# Altium PCB ATK_BC28_01.PcbDoc
Units mil, origin at the board's own origin, x right, y up, seen from the top; angles counter-clockwise.
Board outline 832.03 x 1662.03 mil, 2 copper layers (Top Layer, Bottom Layer); 39 components, 33 nets, 143 pads, 53 vias.
Unrouted connection lines stored in the file: 80.
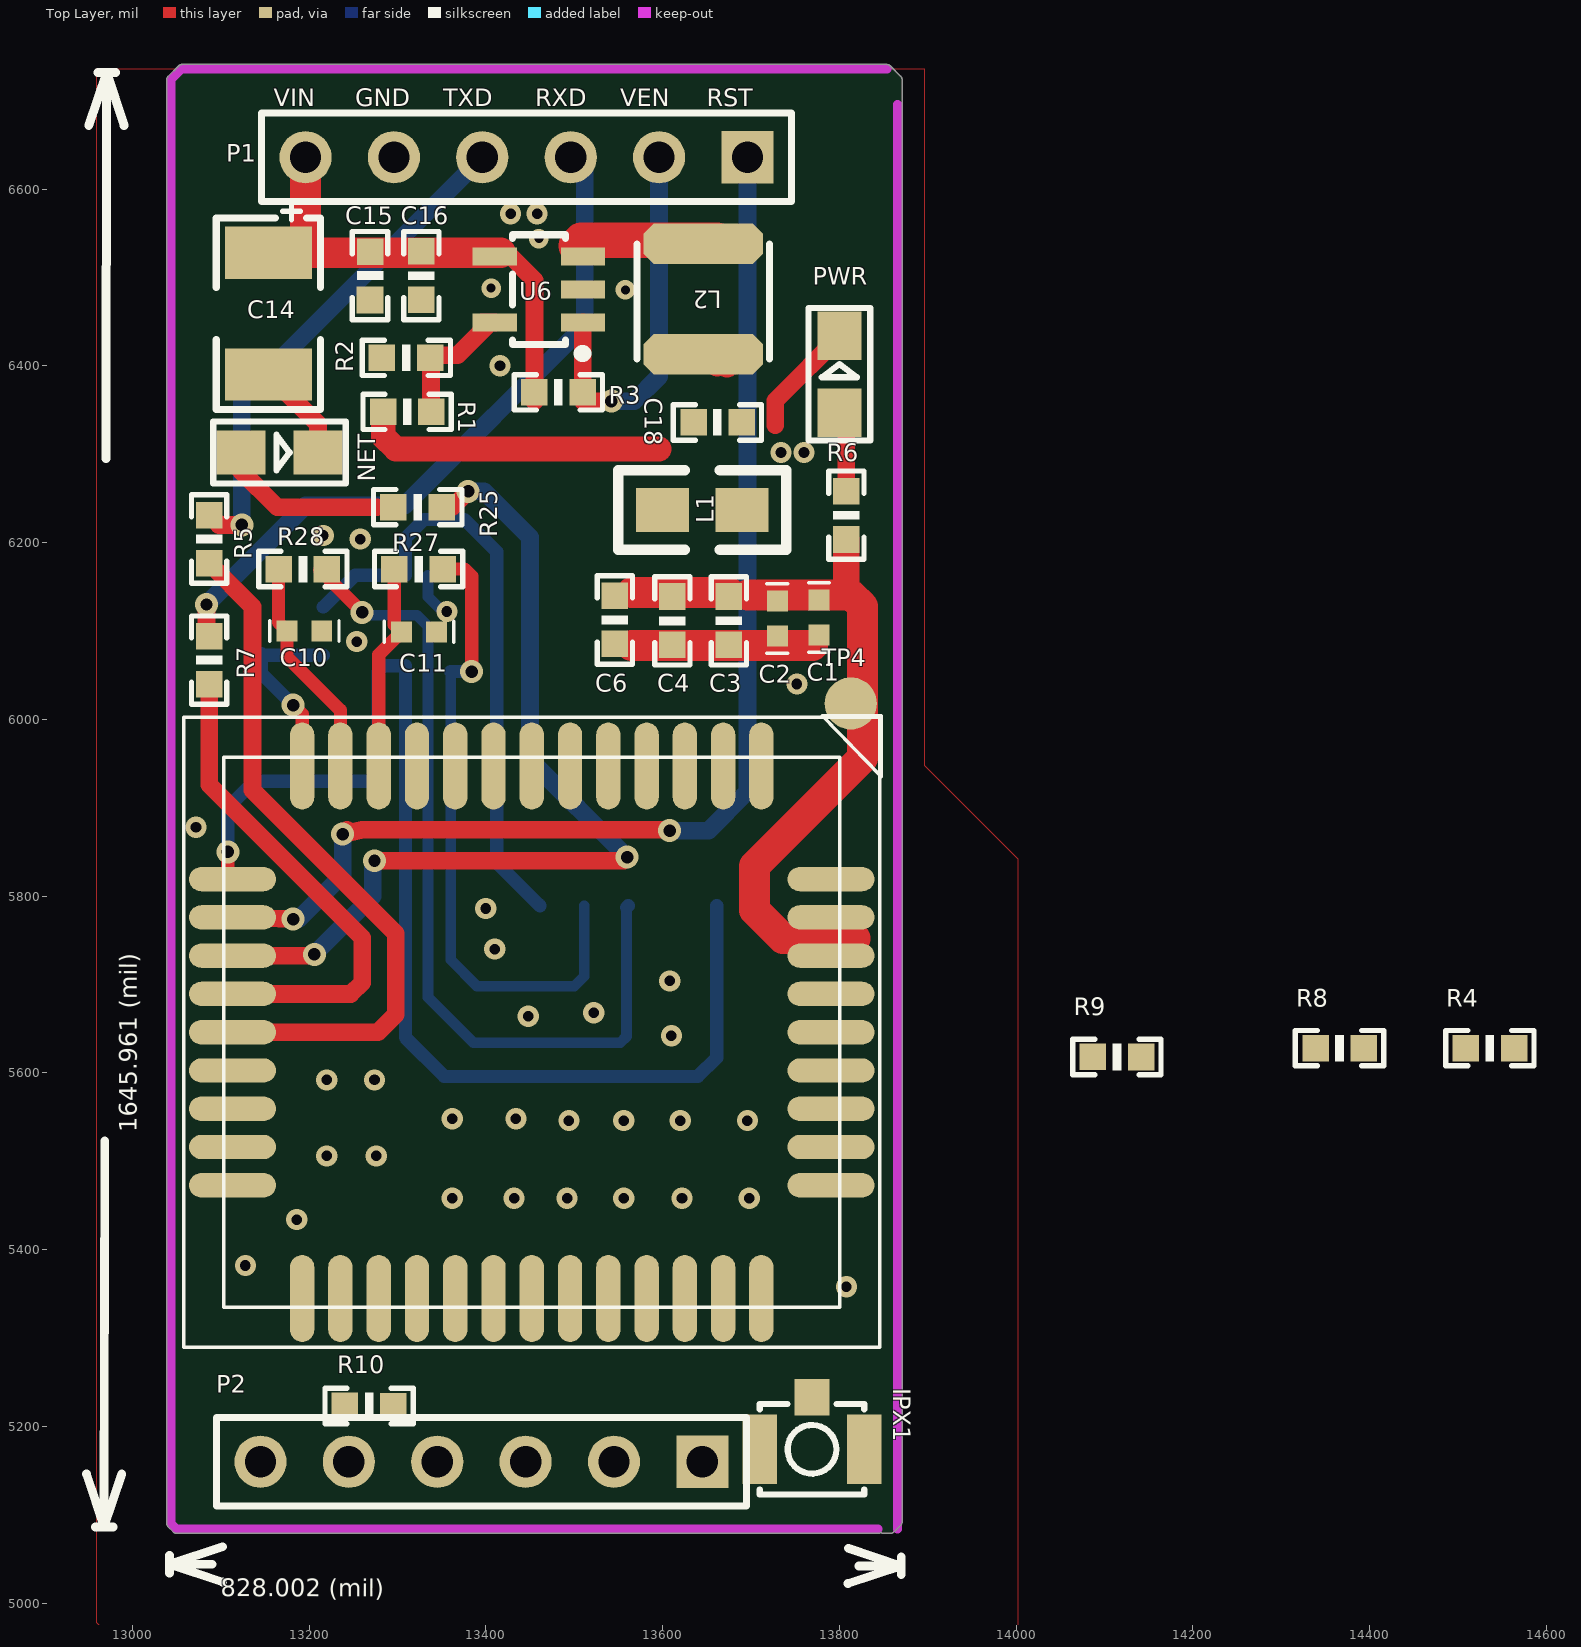
[diagram p0: Top Layer view]
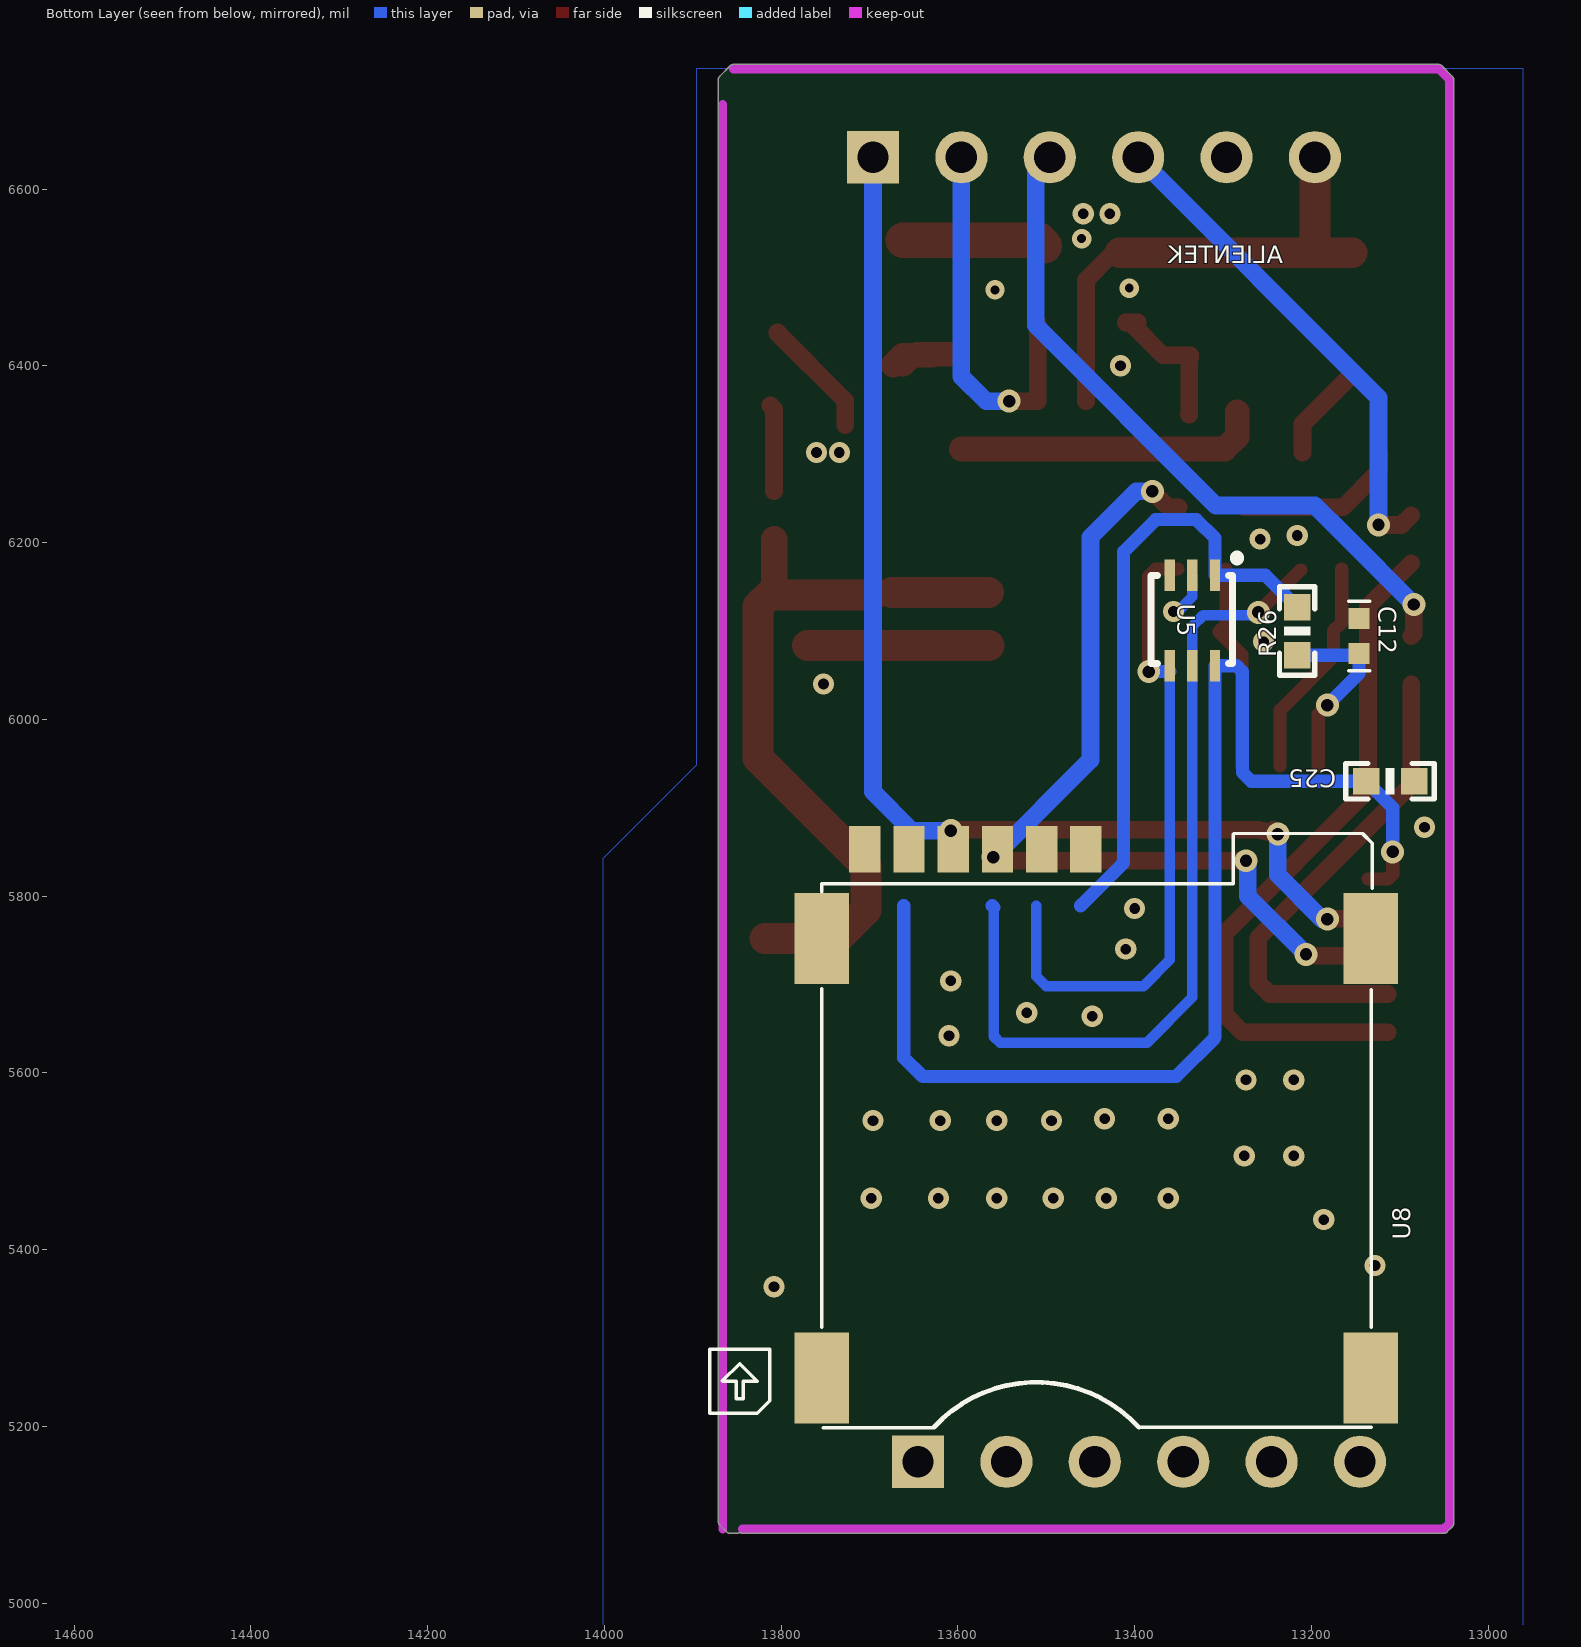
[diagram p1: Bottom Layer view, seen from below]

## Layer stack, top to bottom
Top Layer: signal copper 1.4
Dielectric: dielectric 12.6, FR-4, Dk 4.8
Bottom Layer: signal copper 1.4

## Board outline
13040.45,5086.45 13046.45,5080.45 13046.44,5080.47 ccw(c13050,5084) 13050,5078.98 13844,5078.98 ccw(c13844,5084) 13847,5079.98 ccw(c13850,5084) 13850,5078.98 13858,5078.98 ccw(c13858,5084) 13861.56,5080.47 13861.55,5080.45 13869.55,5088.45 13869.53,5088.44 ccw(c13866,5092) 13871.01,5092 13871.01,6724 ccw(c13866,6724) 13869.53,6727.56 13869.55,6727.55 13857.55,6739.55 13857.56,6739.53 ccw(c13854,6736) 13854,6741.02 13056,6741.02 ccw(c13056,6736) 13052.44,6739.53 13052.45,6739.55 13040.45,6727.55 13040.47,6727.56 ccw(c13044,6724) 13038.99,6724 13038.99,5090 ccw(c13044,5090)

## Design rules (kind name [scope] priority, off if disabled: settings)
Clearance [All] p1: gap=8
Clearance Clearance_Polygon [All] p2: gap=15
Clearance Clearance_Track [All] p3: gap=15
ComponentClearance [All] p1: gap=0 collisioncheckmode=3 verticalgap=0 showdistances=FALSE
FabricationTestPointUsage TestPointUsage [All] p1: valid=0 allowmultiple=FALSE
FabricationTestpoint Testpoint [(IsPad And (OnTopLayer Or OnBottomLayer))] p1: side=3 testpointundercomponent=TRUE minsize=40 maxsize=100 preferedsize=60 minholesize=0 maxholesize=40 preferedholesize=32 testpointgrid=1 allowsidetop=TRUE allowsidebottom=TRUE usegrid=TRUE gridtolerance=0.01
Height [All] p1: minheight=0 maxheight=2000 prefheight=500
HoleSize [All] p1: absolutevalues=TRUE maxlimit=100 minlimit=6 maxpercent=80.000 minpercent=20.000
HoleToHoleClearance [All] p1: gap=8 allowstackedmicrovias=TRUE
MinimumSolderMaskSliver [All] p1: minsoldermaskwidth=0
PlaneConnect [All] p1: planeconnectstyle=Direct reliefexpansion=20 reliefentries=4 reliefconductorwidth=10 reliefairgap=10
PolygonConnect [All] p1: connectstyle=Direct reliefconductorwidth=10 reliefentries=4 polygonreliefangle="90 Angle"
RoomDefinition ATK_BC28_01 [InComponentClass('ATK_BC28_01')] p1: confinementstyle=ConfineOut formatcopy=TRUE lockcomponents=FALSE outline 14538,4464 15002,4464 15002,4716 14538,4716
RoutingVias [All] p1: holewidth=22 width=22 viastyle="Through Hole" minholewidth=10 minwidth=22 maxholewidth=50 maxwidth=100
SilkToSilkClearance [All] p1: silktosilkclearance=0
SilkscreenOverComponentPads [All] p1: minsilkscreentomaskgap=0
SolderMaskExpansion [All] p1: expansion=6
Width PWR_IN [InNet('PWR_IN')] p1: maxlimit=40.94 minlimit=29.53 preferedwidth=39.37 minimp=50.000000 maximp=50.000000 favimp=50.000000
Width GND [InNet('GND')] p2: maxlimit=40 minlimit=10 preferedwidth=25 minimp=50.000000 maximp=50.000000 favimp=50.000000
Width VCC_IN [InNet('VCC_IN')] p3: maxlimit=45 minlimit=20 preferedwidth=40 minimp=50.000000 maximp=50.000000 favimp=50.000000
Width VCC_BAT [InNet('VCC_BAT')] p4: maxlimit=45 minlimit=30 preferedwidth=40 minimp=50.000000 maximp=50.000000 favimp=50.000000
Width [All] p5: maxlimit=45 minlimit=10 preferedwidth=15 minimp=50.000000 maximp=50.000000 favimp=50.000000
18 further rules are at their usual default settings.

## Components (designator, comment, footprint, x,y, rotation, side; value= is the part's Value field where it differs from the comment)
C1 "22pF" 0402 13776.94,6095.5 r90 top
C2 "100pF" 0402 13729.94,6094.5 r90 top
C3 "104" 0603P 13674.94,6111.5 r90 top
C4 "1uF" 0603P 13610.94,6111.5 r90 top
C6 "10uF" 0603P 13545.94,6112.5 r90 top
C10 "22pF" 0402 13175,6100 r0 top
C11 "22pF" 0402 13344,6099 r180 top
C12 "22pF" 0402 13146,6114 r270 bottom
C14 "100uF" C3528 13154,6528 r270 top
C15 "10uF" 0603P 13269,6502 r270 top
C16 "0.1uF" 0603P 13327,6502 r90 top
C18 "10uF" 0603P 13662,6336 r0 top
C25 "104" 0603P 13111,5930 r180 bottom
IPX1 "IPEX" IPEX 13710,5174 r0 top
L1 "270R Beads" 0805 13600,6237 r0 top
L2 "4.7uH" L_4.7 13646,6403 r90 top
NET "LED" SMDLED 13123,6302 r0 top
P1 "Header 6" HDR1X6 13696,6636 r180 top
P2 "Header 6" HDR1X6 13645,5160 r180 top
PWR "LED" SMDLED 13800,6347 r90 top
R1 "50K" 0603P 13311,6348 r0 top
R2 "10K" 0603P 13310,6409 r180 top
R3 "100K" 0603P 13482,6370 r0 top
R4 "1K" 0603P 14536,5628 r0 top
R5 "1K" 0603P 13087,6204 r270 top
R6 "1K" 0603P 13808,6231 r270 top
R7 "1K" 0603P 13087,6067 r270 top
R8 "1K" 0603P 14366,5628 r0 top
R9 "1K" 0603P 14114,5618 r0 top
R10 "1K" 0603P 13268,5223 r180 top
R25 "1K" 0603P 13323,6240 r180 top
R26 "22R" 0603P 13216,6100 r270 bottom
R27 "22R" 0603P 13324,6170 r180 top
R28 "22R" 0603P 13193,6170 r180 top
TP4 "TEST POINT" TP-1.5 13813,6018 r90 top
U5 "SMF05C" SMF05C 13309,6163 r270 bottom
U6 "mp2128" SOT-23-5 13510,6449 r180 top
U8 "Micro SIM" "Micro SIM" 13754,5752 r180 bottom
? "MG2260" MG2260 13452,5646 r270 top

## Footprints (in the part's own frame and the unit in brackets; to place one, negate y for a bottom-side part, rotate by r counter-clockwise, add the part's x,y. Pads: shape width x height; smd on the part's side, far side on the other; paste and mask are expansions set on the pad)
0402 [mm]
  rect 0.6x0.6 smd: 1(0,0) 2(1,0)
  silkscreen extent -0.5,-0.3 1.5,0.3
0603P [mil]
  rect 30x30 smd: 1(-27,0) 2(27.5,-0.06)
  silkscreen extent -50,-20 50,20
0805 [mil]
  rect 60x50 smd: 1(0,-0.06) 2(90,-0.06)
  silkscreen extent -50,-45 140,45
C3528 [mm] "1210 3.5MM*2.8MM"
  rect 1.5x2.5 smd: 1(0,0) 2(3.5,0)
  silkscreen extent -1.45,-1.5 4.5,1.5
HDR1X6 [mm] "Connector; Header; 6 Position"
  rect 1.5x1.5 hole 0.9: 1(0,0)
  round 1.5 hole 0.9: 2(2.54,0) 3(5.08,0) 4(7.62,0) 5(10.16,0) 6(12.7,0)
  silkscreen extent -1.27,-1.27 13.97,1.27
IPEX [mm] "IPEX座 2.6mm*2.6mm*1.25mm"
  rect 1x2 smd: 1(0,0) 3(3,0)
  rect 1x1.05 smd: 2(1.5,1.5)
  silkscreen extent 0,-1.3 3,1.3
L_4.7 [mil] "4mm*4mm"
  oct 45.74x135.48 smd: 1(10,0) 2(135,0)
  silkscreen extent 5,-75 135,75
MG2260 [mm]
  oval 2.5x0.7 smd: 1(-7.65,6.6) 2(-7.65,5.5) 3(-7.65,4.4) 4(-7.65,3.3) 5(-7.65,2.2) 6(-7.65,1.1) 7(-7.65,0) 8(-7.65,-1.1) 9(-7.65,-2.2) 10(-7.65,-3.3) 11(-7.65,-4.4) 12(-7.65,-5.5) 13(-7.65,-6.6) 23(7.65,-6.6) 24(7.65,-5.5) 25(7.65,-4.4) 26(7.65,-3.3) 27(7.65,-2.2) 28(7.65,-1.1) 29(7.65,0) 30(7.65,1.1) 31(7.65,2.2) 32(7.65,3.3) 33(7.65,4.4) 34(7.65,5.5) 35(7.65,6.6)
  oval 0.7x2.5 smd: 14(-4.4,-8.6) 15(-3.3,-8.6) 16(-2.2,-8.6) 17(-1.1,-8.6) 18(0,-8.6) 19(1.1,-8.6) 20(2.2,-8.6) 21(3.3,-8.6) 22(4.4,-8.6) 36(4.4,8.6) 37(3.3,8.6) 38(2.2,8.6) 39(1.1,8.6) 40(0,8.6) 41(-1.1,8.6) 42(-2.2,8.6) 43(-3.3,8.6) 44(-4.4,8.6)
  silkscreen extent -9.1,-10 9.05,10.05
"Micro SIM" [mm] "6P 自弹式"
  rect 0.9x1.34 smd: 1(1.24,2.565) 2(2.51,2.565) 3(3.78,2.565) 4(5.05,2.565) 5(6.32,2.565) 6(7.59,2.565)
  rect 1.56x2.61 smd: ""(0,-12.63) ""(0,0) ""(15.78,-12.63) ""(15.78,0)
  silkscreen extent -3.23,-14.06 15.82,3.02
SMDLED [mm]
  rect 1.4x1.27 smd: 1(0.001,-0.002) 2(2.211,-0.002)
  silkscreen extent -0.8,-0.89 3.01,0.89
SMF05C [mm] "SOT-363"
  rect 0.9x0.3 smd: 1(0,0) 2(0,-0.65) 3(0,-1.3) 4(2.6,-1.3) 5(2.6,-0.65) 6(2.6,0)
  silkscreen extent -0.51,-1.84 2.54,0.64
SOT-23-5 [mil]
  rect 50x20 smd: 1(0,0) 2(0,-37.4) 3(0,-74.8) 4(100,-74.8) 5(100,0)
  silkscreen extent 0,-99 80,35
TP-1.5 [mm] "1.5mm"
  round 1.5 smd: 1(0,0)

## Part data
C1 C2 C3 C4 C6 C10 C11 C12 C15 C16 C18 C25: library part C
C14: library part CAP
IPX1: "IPEX座"
L1: library part L
L2: library part L_SOP
P1 P2: "Header, 6-Pin"
R1 R2 R3 R4 R5 R6 R7 R8 R9 R10 R25 R26 R27 R28: library part R
TP4: library part TEST-POINT, "测试点"
U5: "TVS"

## Via types
v1: diameter 24, hole 12, Top Layer to Bottom Layer, 36 vias
v2: diameter 26, hole 14, Top Layer to Bottom Layer, 14 vias
v3: diameter 22, hole 10, Top Layer to Bottom Layer, 3 vias

## Nets (pads, with @x,y where several pads share a name; then routed paths per layer and width w, separated by ;. In a path a pad name is that pad's centre, name@x,y a point inside that pad or via, vN(x,y) a via of type N, cw(c..) or ccw(c..) an arc to the next point about the centre after c; other vN are vias at no path point)
ADC: ?.9 P2.5
DRXD: P2.3 R8.1
DTXD: P2.4 R4.1
GND: ?.1 ?.10 ?.27 ?.34 ?.36 ?.37 ?.40 ?.41 C1.1 C2.1 C3.1 C4.1 C6.1 C10.2 C11.1 C12.1 C14.2 C15.2 C16.1 C18.2 C25.2 IPX1.1 IPX1.3 NET.2 P1.5 PWR.2 R2.2 U5.2 U6.2 U8.1 | length 506
  Top Layer w20: C14.2 13210.04,6334.16 NET.2 ; 13727.5,6332.94 13727.5,6360.62 13804.06,6437.18 PWR.2@13804.06,6438.04
  Top Layer w35: 13564.94,6083.5 13666.94,6083.5 13769.94,6083.5
  Bottom Layer w12: U5.2 13334.59,6138.59 13351.18,6122 v1(13356,6122)
  other v1: 13808,5358 13128,5382 13186,5434 13362,5458 13432,5458 13492,5458 13556,5458 13622,5458 13698,5458 13220,5506 13276,5506 13494,5546 13556,5546 13620,5546 13696,5546 13362,5548 13434,5548 13220,5592 13274,5592 13610,5642 13448,5664 13522,5668 13608,5704 13410,5740 13400,5786 13072,5878 13752,6040 13254,6088 13258,6204 13216,6208 13734,6302 13760,6302 13416,6400 13428,6572 13458,6572
  other v3: 13558,6486 13406,6488 13460,6544
NetC18_1: C18.1 L1.2 L2.1 R1.1 | length 447.1
  Top Layer w28: R1.1 13284,6320 13298,6306 13596,6306 ; L2.1@13610,6413 L2.1 ; L2.1@13629.32,6412 L2.1@13662,6412 ; L2.1@13657,6407 L2.1@13662,6412 ; L2.1@13662,6402 L2.1@13662,6412 ; L2.1@13673,6401 L2.1@13662,6412
NetL2_2: L2.2 U6.3 | length 162.5
  Top Layer w40: 13502,6536 13508,6542 L2.2@13662,6542
NETLIGHT: ?.16 R25.1 | length 1041.1
  Top Layer w20: ?.16 v2@13204.61,5732.61 ; v2(13274,5840) v2@13556,5840 ; R25.1 13362,6240 v2(13380,6258)
  Bottom Layer w20: v2(13206,5734) 13272,5800 v2@13272,5838 ; v2(13380,6258) 13398,6258 13450,6206 13450,5954 v2(13560,5844)
NetNET_1: NET.1 R25.2 | length 191.3
  Top Layer w20: NET.1 13123.03,6281.03 13164,6240.06 13276.5,6240.06
NetPWR_1: PWR.1 R6.1 | length 98.7
  Top Layer w20: R6.1 13808,6350.97 PWR.1@13812.06,6355.03
NetR1_2: R1.2 R2.1 U6.5 | length 162
  Top Layer w20: R2.1 13337,6412 13368,6412 U6.5@13405,6449 ; R2.1@13338,6407 13338,6345.44 R1.2@13338.5,6344.94 ; U6.5@13396.56,6449 U6.5@13405,6449 ; U6.5 U6.5@13405,6449
NetR27_1: R27.1 U5.4 U8.5 | length 742.1
  Top Layer w15: R27.1 13376,6170 13384,6162 v2(13384,6054)
  Bottom Layer w12: U5.4@13360.18,6054 13360.18,5727.82 13390,5698 13500,5698 13511.18,5709.18 13511.18,5789
  Bottom Layer w15: U5.4@13360.18,6054 v2(13384,6054)
NetR28_1: R28.1 U5.5 U8.4 | length 972.4
  Top Layer w15: R28.1@13212,6169 v2(13260,6121) v2@13260,6118
  Bottom Layer w12: v2@13260,6118 v2@13263,6118 ; v2(13260,6121) v2@13263,6118 ; 13559.18,5787 13559.18,5663.18 13559.18,5641.18 13552,5634 13386,5634 13334.59,5685.41 U5.5 13334.59,6105.41 13322,6118 v2@13263,6118
  Bottom Layer w15: 13559.18,5787 13561.18,5789
PSM_EINT: ?.19 P2.6
RF_AN: ?.35 IPX1.2
RI: P2.2 R9.1
RI_SCL: ?.20 R9.2
RI_SDA: ?.21 R10.2
RST: ?.15 P1.1 | length 1377.6
  Top Layer w20: ?.15 v2(13182,5774) ; v2@13243,5875 v2(13238,5870) 13260,5875 13607,5875 v2(13608,5874)
  Bottom Layer w20: v2@13188,5774 13238,5824 v2@13238,5860 ; v2(13608,5874) 13652,5874 13696,5918 P1.1
RXD: P1.3 R7.1 | length 792.8
  Top Layer w20: v2(13084,6130) 13084,6097 R7.1
  Bottom Layer w20: v2(13084,6130) 13162,6208 13196,6242 13308,6242 13512,6446 13512,6620 P1.3
SDA: P2.1 R10.1
SIM_CLK: ?.13 C12.2 R26.2 | length 217.5
  Top Layer w15: v2(13182,6016) 13192.16,6005.84 ?.13
  Bottom Layer w15: v2(13182,6016) 13146,6052 C12.2 13148.13,6072.5 R26.2
SIM_CLKP: R26.1 U5.1 U8.6 | length 716.7
  Bottom Layer w15: R26.1 13252,6163 U5.1 13309,6205 13330,6226 13342,6226 ; 13358,6226 13342,6226 ; 13459.18,5791 13461.18,5789 13415.09,5835.09 13412.5,5837.68 13412.5,6189.5 13376,6226 13342,6226
SIM_DATA: ?.11 C11.2 R27.2 | length 237
  Top Layer w15: ?.11 13278.77,6073.14 C11.2 13296.5,6107.13 R27.2
SIM_RST: ?.12 C10.1 R28.2 | length 251.9
  Top Layer w15: R28.2 13165.5,6109.5 C10.1 13175,6071 13235.46,6010.54 ?.12
SIM_VDD: ?.14 C25.1 U5.6 U8.2 | length 1418.4
  Top Layer w15: v2(13108,5850) 13108,5824.65 ?.14 ?.14@13136,5819.23
  Bottom Layer w15: v2(13108,5850) 13108,5900 C25.1 ; C25.1@13136,5928 C25.1 ; C25.1@13138,5926 C25.1 ; 13661.18,5789 13661.18,5617.18 13640,5596 13353,5596 13309,5640 U5.6 13284.64,6060.64 13278,6054 13278,5940 13268,5930 C25.1
TXD: P1.4 R5.1 | length 570.2
  Top Layer w20: R5.1 13098,6220 v2(13124,6220)
  Bottom Layer w20: v2(13124,6220) 13124,6364 P1.4
UART1_RXD: ?.17 R7.2 | length 561
  Top Layer w20: R7.2 13086.94,5926.09 13260,5753.02 13260,5702 13247.31,5689.31 ?.17
UART1_TXD: ?.18 R5.2 | length 790.8
  Top Layer w20: R5.2 13136,6127.44 13136,5919.6 13298,5757.6 13298,5666 13278,5646 ?.18
UART2_RXD: ?.38 R8.2
UART2_TXD: ?.39 R4.2
VCC_BAT: ?.42 ?.43 C1.2 C2.2 C3.2 C4.2 C6.2 L1.1 R6.2 TP4.1 | length 819.7
  Top Layer w30: 13807.94,6150.75 R6.2
  Top Layer w35: 13565.12,6143.31 C3.2@13675,6143.31 ; 13696.06,6140.81 13813.19,6140.81 13826,6128 13826,5956 13704,5834 13704,5784 13736,5752 13818,5752
VEN: P1.2 R3.2 U6.1 | length 435.4
  Top Layer w20: U6.1 13509.5,6448.5 13509.5,6359.94 13541.94,6359.94 v2(13542,6360)
  Bottom Layer w20: v2(13542,6360) 13568,6360 13596,6388 P1.2
VIN: C14.1 C15.1 C16.2 P1.6 R3.1 U6.4 | length 563.9
  Top Layer w20: U6.4@13396,6528 U6.4@13400.2,6523.8 ; U6.4@13416.5,6523.8 13428.2,6523.8 13455,6497 R3.1@13455,6360
  Top Layer w35: C14.1 C14.1@13198,6528 ; P1.6 13196,6530 C14.1@13198,6528 ; U6.4@13416.5,6528 13396,6528 13332.06,6528 C14.1@13198,6528
pads on no net: ?.2 ?.3 ?.4 ?.5 ?.6 ?.7 ?.8 ?.22 ?.23 ?.24 ?.25 ?.26 ?.28 ?.29 ?.30 ?.31 ?.32 ?.33 ?.44 U5.3 U8. U8.3

## Polygon pours and split planes (outlines as drawn)
GND on Bottom Layer "Bottom Layer-No Net" (solid, remove dead copper, shelved, pour order 1000): 12960,6736 13896,6736 13896,5948 14002,5842 14002,5840 14002,4970 12966,4970 12960,4976
GND on Top Layer "Bottom Layer-No Net" (solid, remove dead copper, shelved, pour order 1001): 12960,6736 13896,6736 13896,5948 14002,5842 14002,4970 12966,4970 12966,4972 12960,4978

## Keep-outs
Keep-Out Layer:
  lines w10: 13808,6736 13854,6736 ; 13816,6736 13082,6736 13056,6736 13044,6724 13044,5090 13050,5084 13074,5084 13844,5084 ; 13866,5084 13866,6696

## Silkscreen, mask and mechanical layers (free items; w line width, h text height)
Top Overlay:
  lines w10: 12948.1,5146.03 12968,5086 ; 12950.77,6671.99 12970.87,6731.96 ; 12958,5086.02 12978,5085.98 ; 12960.87,6731.98 12980.87,6731.94 ; 12968.76,5523.1 12968,5086 ; 12970.11,6294.86 12970.87,6731.96 ; 12988.1,5145.97 12968,5086 ; 12990.77,6671.92 12970.87,6731.96 ; 13041.98,5034 13042.02,5054 ; 13090.11,5043.88 13042,5044 ; 13101.95,5023.86 13042,5044 ; 13102.05,5063.85 13042,5044 ; 13809.95,5022.15 13870,5042 ; 13810.05,5062.14 13870,5042 ; 13821.89,5042.12 13870,5042 ; 13869.98,5032 13870.02,5052
  text "VIN" at 13160,6694 h20
  text "GND" at 13252,6694 h20
  text "TXD" at 13352,6694 h20
  text "RXD" at 13456,6694 h20
  text "VEN" at 13552,6694 h20
  text "RST" at 13650,6694 h20
  text "1645.961 (mil)" at 13004.77,5533.04 h20 r89.9
  text "828.002 (mil)" at 13100.03,5007.87 h20 r359.86
Bottom Overlay:
  text "ALIENTEK" at 13232,6516 h20